# Altium PCB GPS_tracker PCB.PcbDoc (part 1 of 2)
Units mm, origin at the board's own origin, x right, y up, seen from the top; angles counter-clockwise.
Board outline 70 x 70 mm, 2 copper layers (Top Layer, Bottom Layer), stack 1.57 mm thick; 71 components, 56 nets, 304 pads, 132 vias.
Unrouted connection lines stored in the file: 4.
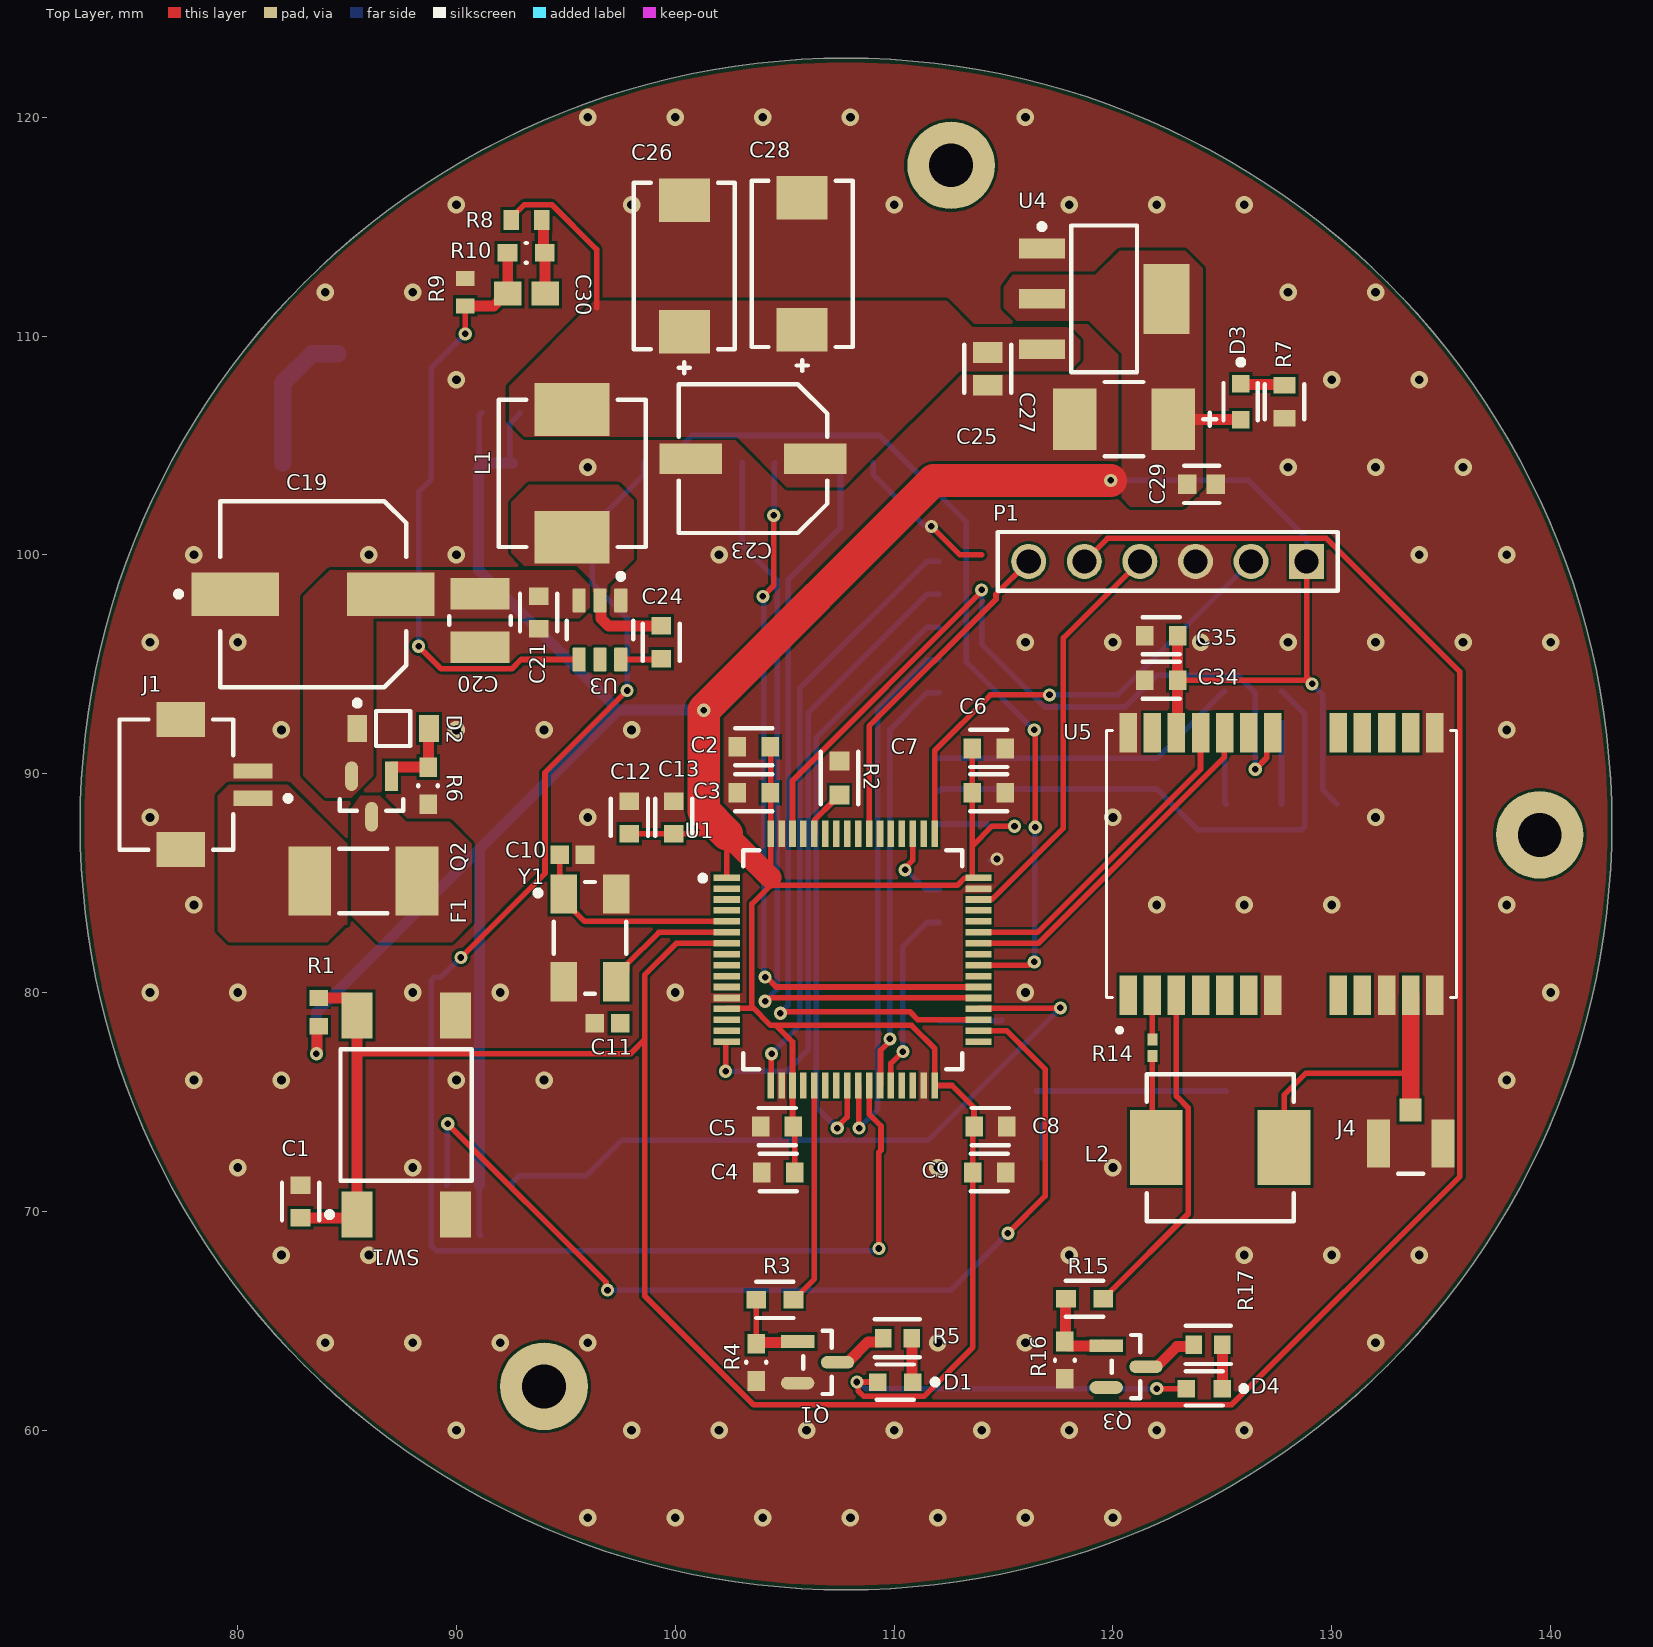
[diagram p0: Top Layer view]
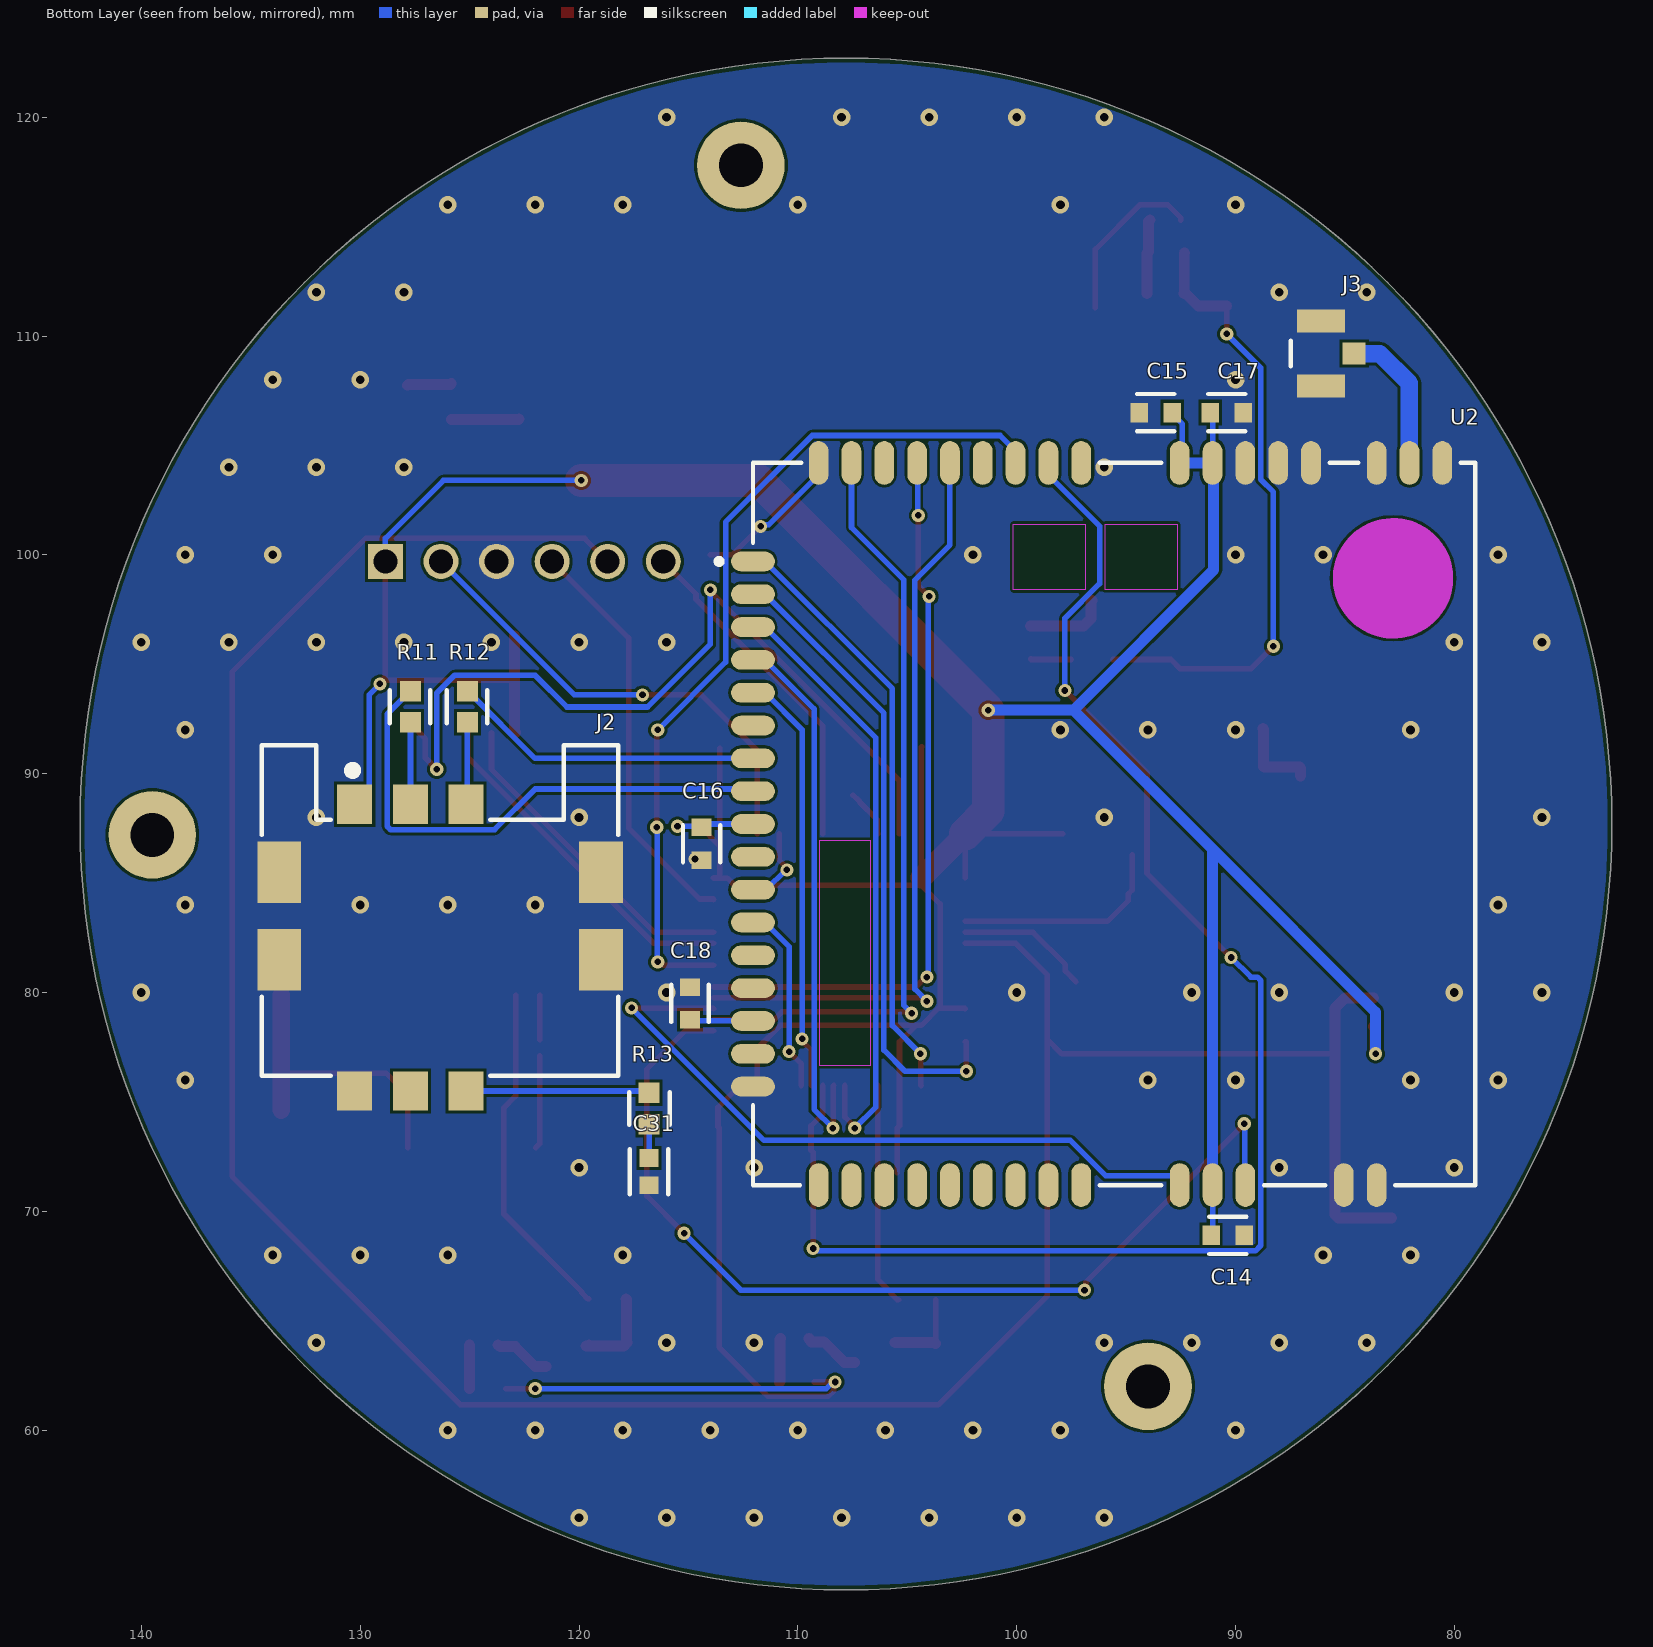
[diagram p1: Bottom Layer view, seen from below]
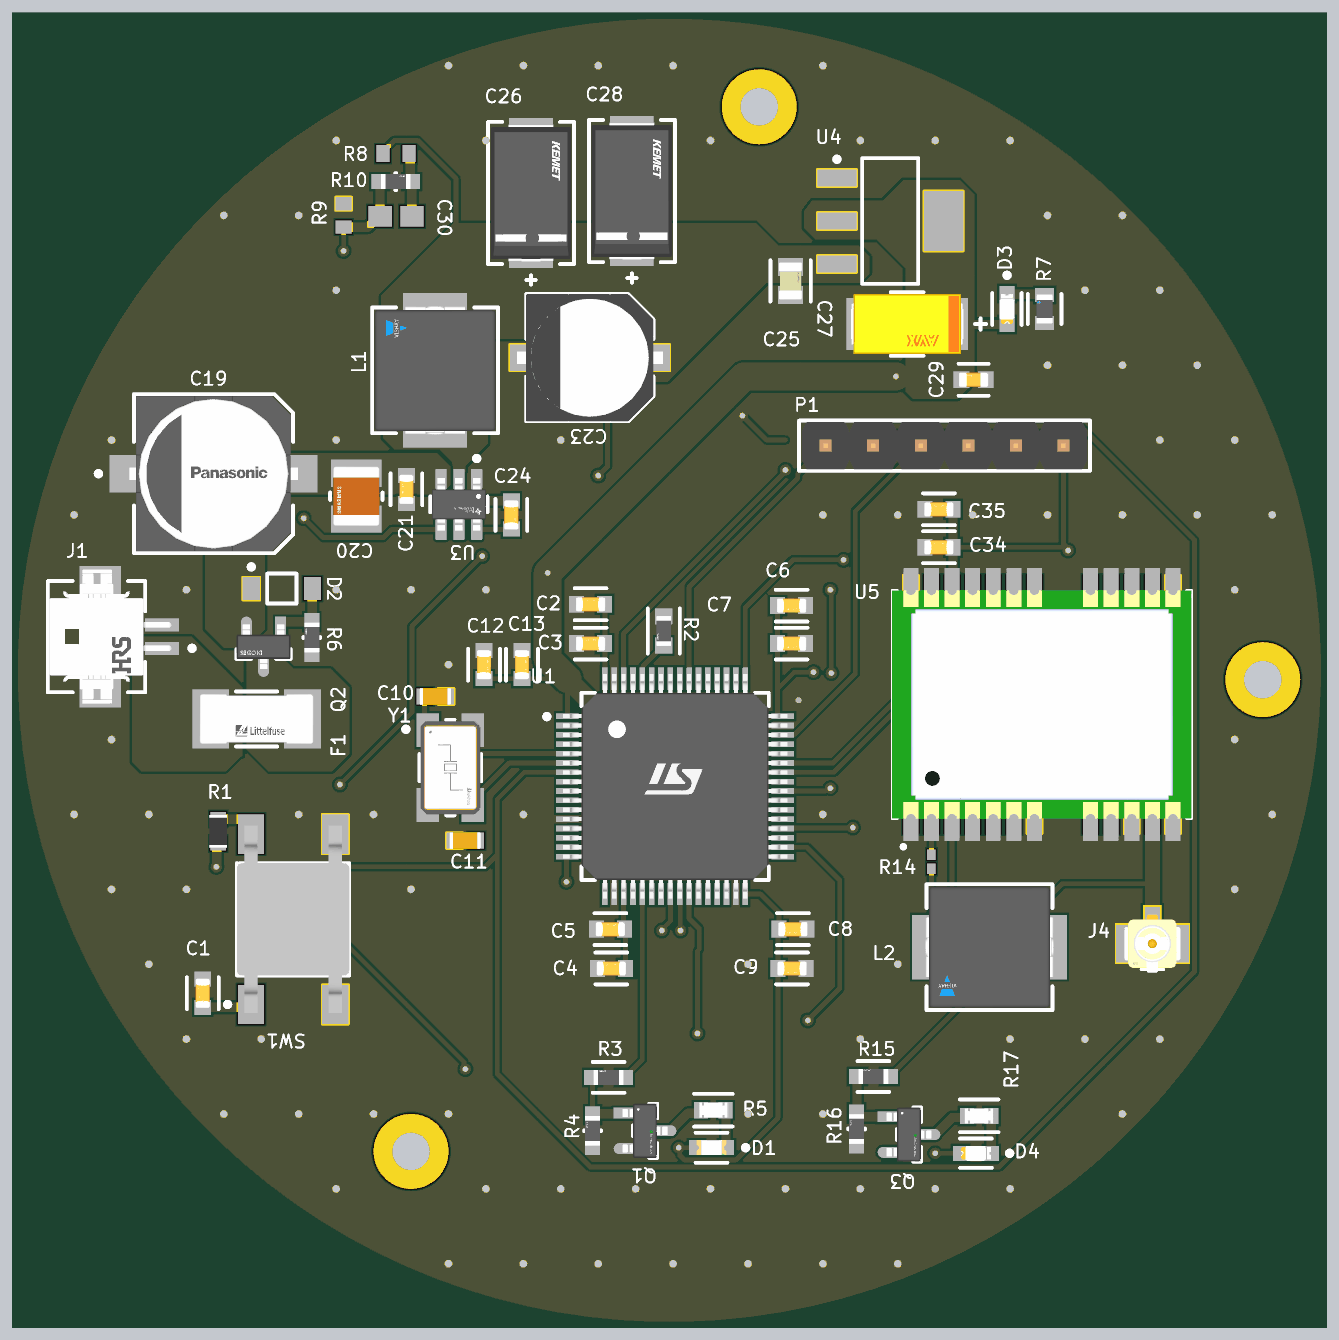
[diagram p2: 3D render of the assembled board from above, using the file's embedded part models]
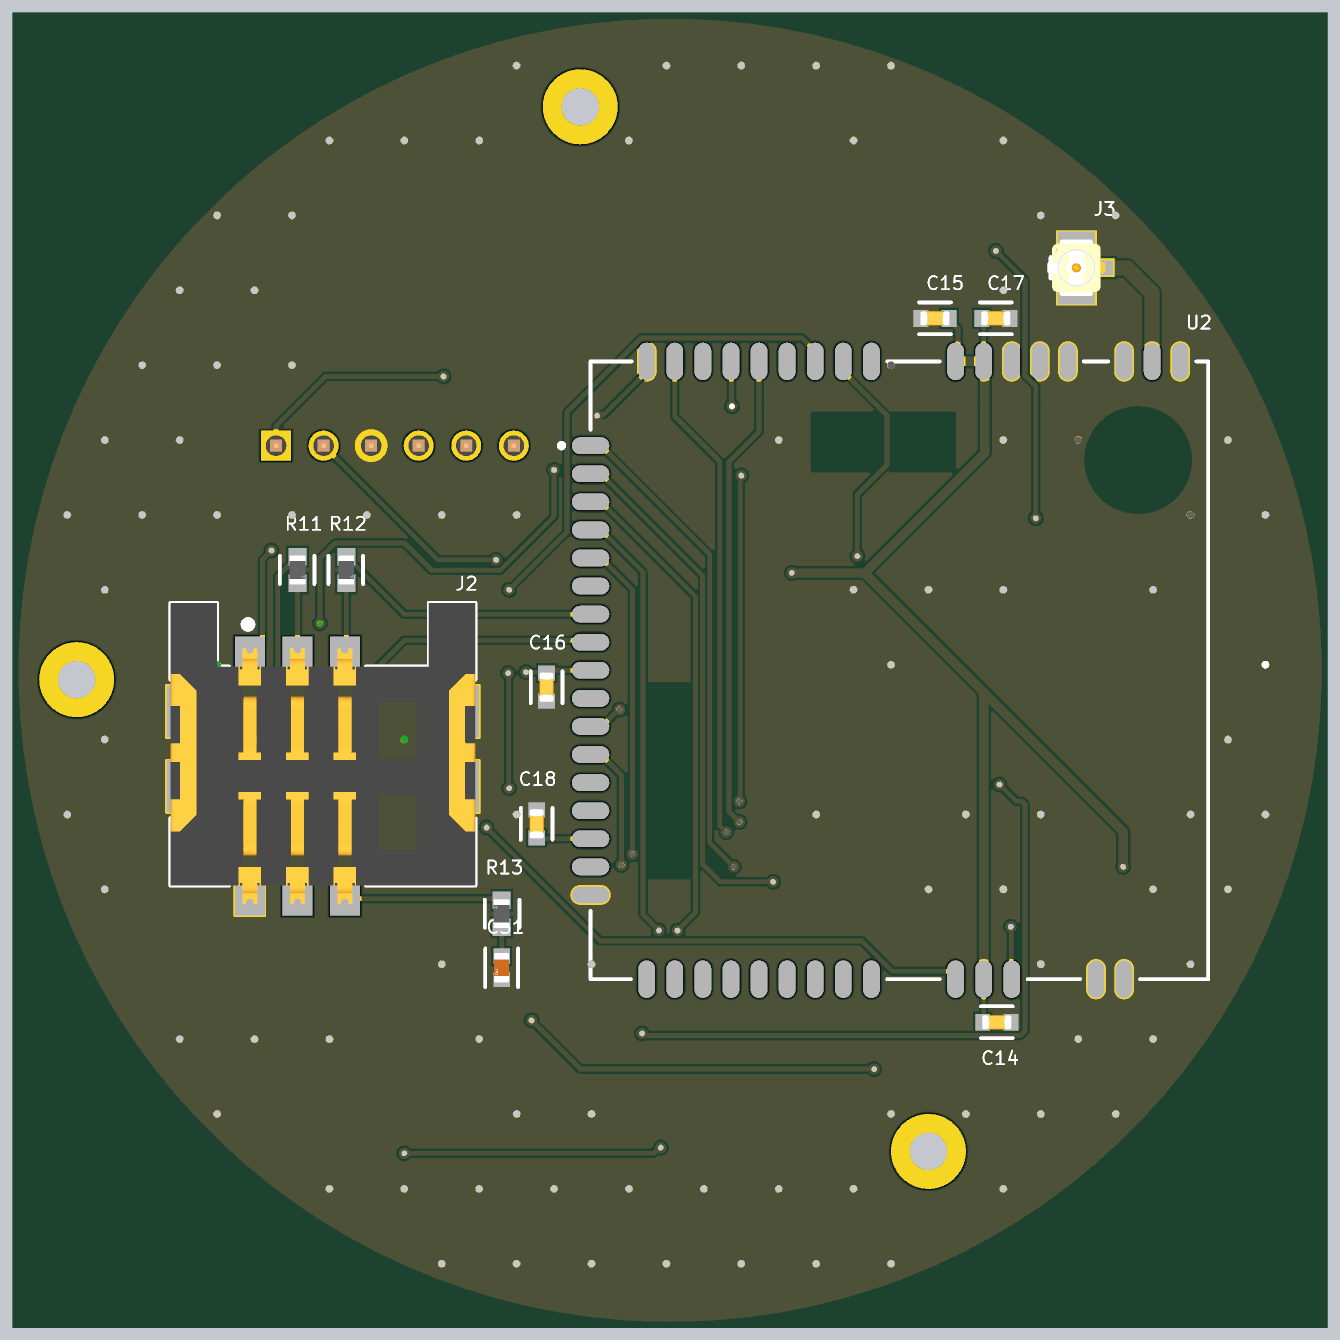
[diagram p3: 3D render of the assembled board from below, using the file's embedded part models]

## Layer stack, top to bottom
Top Solder: solder mask 0.0127, Solder Resist, Dk 3.8
Top Layer: signal copper 0.035
Dielectric: core 1.5, FR-4, Dk 4.5
Bottom Layer: signal copper 0.035
Bottom Solder: solder mask 0.0127, Solder Resist, Dk 3.8

## Board outline
72.8,87.7 ccw(c107.8,87.7) 107.8,52.7 ccw(c107.8,87.7) 142.8,87.7 ccw(c107.8,87.7) 107.8,122.7 ccw(c107.8,87.7)

## Design rules (kind name [scope] priority, off if disabled: settings)
BoardOutlineClearance [All] p1: gap=0.2 ignorepadtopadclearanceinfootprint=FALSE
Clearance [All] p1: gap=0.127 ignorepadtopadclearanceinfootprint=FALSE except(0.25: Arc-Hole Track-Hole SMDPad-Hole THPad-Hole Via-Hole Fill-Hole Poly-Hole Region-Hole Text-Hole)
ComponentClearance [All] p1: gap=0.127 collisioncheckmode=3 verticalgap=0.127 showdistances=TRUE
DiffPairsRouting [All] p1: maxlimit=0.254 minlimit=0.127 mostfreqgap=0.127 toplayer_minwidth=0.127 toplayer_maxwidth=25.4 toplayer_prefwidth=0.127 bottomlayer_minwidth=0.127 bottomlayer_maxwidth=25.4 bottomlayer_prefwidth=0.127 maxuncoupledlength=12.7
Height [All] p1: minheight=0 maxheight=1816.048 prefheight=12.7
HoleSize [All] p1: absolutevalues=TRUE maxlimit=6.3 minlimit=0.3 maxpercent=80.000 minpercent=20.000
HoleToHoleClearance [All] p1: gap=0.25 allowstackedmicrovias=FALSE
MinimumAnnularRing [All] p1: minimumring=0.076
MinimumSolderMaskSliver [All] p1: minsoldermaskwidth=0
PlaneClearance [All] p1: clearance=0.127
PlaneConnect PlaneConnectPowerPads [InPadClass('PowerPads')] p1: planeconnectstyle=Direct reliefexpansion=0.508 reliefentries=4 reliefconductorwidth=0.254 reliefairgap=0.254
PlaneConnect [All] p2: pad.planeconnectstyle=Relief pad.reliefexpansion=0.3 pad.reliefentries=4 pad.reliefconductorwidth=0.127 pad.reliefairgap=0.127 via.planeconnectstyle=Direct via.reliefexpansion=0.3 via.reliefentries=4 via.reliefconductorwidth=0.127 via.reliefairgap=0.127
PolygonConnect PolygonConnectPowerPads [All vs (InPadClass('PowerPads'))] p1: connectstyle=Direct reliefconductorwidth=0.254 reliefentries=4 polygonreliefangle="90 Angle" airgapwidth=0.254
PolygonConnect [All] p2: connectstyle=Direct reliefconductorwidth=0.127 reliefentries=4 polygonreliefangle="90 Angle" airgapwidth=0.127
RoutingVias [All] p1: holewidth=0.3 width=0.6 viastyle="Through Hole" minholewidth=0.3 minwidth=0.6 maxholewidth=0.6 maxwidth=6.6
SilkToSilkClearance [All] p1: silktosilkclearance=0
SilkToSolderMaskClearance [IsPad] p1: minsilkscreentomaskgap=0.127 clearancetoexposedcopper=TRUE
SolderMaskExpansion [All] p1: expansion=0.075 istentingtop=FALSE
Width [All] p1: maxlimit=1.5 minlimit=0.127 preferedwidth=0.254
20 further rules are at their usual default settings.

## Classes and differential pairs
component class "GPS_tracker PWR": C14 C15 C16 C17 C18 C19 C20 C21 C23 C24 C25 C26 C27 C28 C29 C30 D2 D3 F1 J1 L1 Q2 R6 R7 R8 R9 R10 U3 U4
component class "GPS_tracker MCU": C1 C2 C3 C4 C5 C6 C7 C8 C9 C10 C11 C12 C13 D1 P1 Q1 R1 R2 R3 R4 R5 SW1 U1 Y1
component class GPS_tracker_GPS_and_GSM: C31 C34 C35 D4 J2 J3 J4 L2 Q3 R11 R12 R13 R14 R15 R16 R17 U2 U5

## Components (designator, comment, footprint, x,y, rotation, side; value= is the part's Value field where it differs from the comment)
C1 "CC0603KRX7R7BB104" FP-CC0603-DA-MFG 82.875,70.45 r270 top value="100 nF"
C2 "CC0603KRX7R7BB104" FP-CC0603-DA-MFG 103.59,91.227 r180 top value="100 nF"
C3 "CC0603KRX7R7BB105" FP-CC0603-DA-MFG 103.59,89.127 r180 top value="1 uF"
C4 "CC0603KRX7R7BB104" FP-CC0603-DA-MFG 104.7,71.773 r180 top value="100 nF"
C5 "CC0603KRX7R7BB105" FP-CC0603-DA-MFG 104.65,73.873 r180 top value="1 uF"
C6 "CC0603KRX7R7BB104" FP-CC0603-DA-MFG 114.327,91.155 r0 top value="100 nF"
C7 "CC0603KRX7R7BB105" FP-CC0603-DA-MFG 114.327,89.127 r0 top value="1 uF"
C8 "CC0603KRX7R7BB104" FP-CC0603-DA-MFG 114.4,73.873 r0 top value="100 nF"
C9 "CC0603KRX7R7BB105" FP-CC0603-DA-MFG 114.35,71.773 r0 top value="1 uF"
C10 "CC0603JRNPO9BN180" CAPC1608X90X40LL10T20 95.3,86.302 r180 top
C11 "CC0603JRNPO9BN180" CAPC1608X90X40LL10T20 96.9,78.6 r0 top
C12 "CC0603KRX7R7BB104" FP-CC0603-DA-MFG 97.9,88 r90 top value="100 nF"
C13 "CC0603KRX7R7BB105" FP-CC0603-DA-MFG 99.927,88 r90 top value="1 uF"
C14 "CC0603KRX7R7BB104" FP-CC0603-DA-MFG 90.35,68.9 r180 bottom value="100 nF"
C15 "CC0603KRX7R7BB104" FP-CC0603-DA-MFG 93.65,106.5 r0 bottom value="100 nF"
C16 "CC0603KRX7R7BB104" FP-CC0603-DA-MFG 114.4,86.8 r270 bottom value="100 nF"
C17 "CC0603KRX7R7BB104" FP-CC0603-DA-MFG 90.4,106.5 r180 bottom value="100 nF"
C18 "CC0603KRX7R7BB104" FP-CC0603-DA-MFG 114.927,79.5 r90 bottom value="100 nF"
C19 "EEEFK1V221P" FP-FKF-MFG 83.45,98.202 r0 top
C20 "CL32B106KBJNNNE" FP-CL32-IPC_C 91.077,97 r270 top
C21 "CC0603KRX7R7BB104" FP-CC0603-DA-MFG 93.755,97.366 r270 top value="100 nF"
C23 "EEEFK1C101P" PNSC-EEEFK1C101P_L 103.55,104.398 r180 top
C24 "CC0603KRX7R7BB104" FP-CC0603-DA-MFG 99.359,96 r90 top value="100 nF"
C25 "C0805C104K5RACTU" FP-C0805C-DN-MFG 114.273,108.5 r270 top value="0.10 μF"
C26 "T521D107M025ATE040" FP-T521D107M025ATE040-MFG 100.409,113.2 r270 top
C27 "TAJC227K006RNJ" FP-TAJC-MFG 120.5,106.198 r0 top
C28 "T521D107M025ATE040" FP-T521D107M025ATE040-MFG 105.8,113.3 r270 top
C29 "C0603X104K5RACTU" FP-C0603-CJ-MFG 124.05,103.22 r0 top value=100nF
C30 "06035A750JAT2A" CAPC1608X90X35ML15T15 93.2,111.948 r0 top
C31 "06035A220JAT2A" FP-0603-L_1_6_0_15-W_0_81-IPC_C 116.8,71.811 r270 bottom
C34 "CC0603KRX7R7BB104" FP-CC0603-DA-MFG 122.2,94.273 r180 top value="100 nF"
C35 "CC0603KRX7R7BB105" FP-CC0603-DA-MFG 122.2,96.3 r180 top value="1 uF"
D1 "150060RS75000" FP-150060RS75000-MFG 110.05,62.198 r180 top
D2 "MMSZ4699T1G" ONSC-SOD-123-2-425-04_V 87.1,92.065 r0 top
D3 "SML-D12P8WT86C" FP-SML-D12-MFG 125.839,107 r270 top
D4 "SML-D12P8WT86C" FP-SML-D12-MFG 124.175,61.9 r180 top
F1 "0452001.MRL" FP-0452-MFG 85.749,85.1 r0 top value=0.225Ω
J1 "DF13A-2P-1.25H(21)" FP-DF13A-2P-1_25H_21-MFG 77.2,89.5 r90 top
J2 "693010010601" 693010010601 126.35,83.75 r180 bottom
J3 "U.FL-R-SMT-1(10)" FP-U_FL-R-SMT-1_10-MFG 86.1,109.2 r270 bottom
J4 "U.FL-R-SMT-1(10)" FP-U_FL-R-SMT-1_10-MFG 133.6,73.1 r0 top
L1 "IHLP2525CZER100M11" FP-IHLP-2525CZ-FP_2_413x3-MFG 95.286,103.721 r90 top
L2 "IHLP2525CZER220M11" FP-IHLP-2525CZ-FP_2_413x3-MFG 124.9,72.911 r180 top
P1 "61300611121" 61300611121 122.5,99.7 r180 top
Q1 "MMBF170LT1G" FP-318-08-IPC_B 106.5,63.1 r0 top
Q2 "DMP3099L-7" FP-SOT23-IPC_B 86.123,88.958 r270 top
Q3 "MMBF170LT1G" FP-318-08-IPC_B 120.6,62.9 r0 top
R1 "ERJ3EKF1002V" RESC1609X55X30LL15T15 83.7,79.1 r90 top
R2 "AC0603FR-071KL" FP-AC0603-IPC_B 107.5,89.8 r270 top
R3 "AC0603FR-07150RL" FP-AC0603-MFG 104.55,65.952 r180 top
R4 "RC0603FR-07100KL" FP-RC0603-0_55-MFG 103.7,63.1 r90 top
R5 "ERJ-3EKF2000V" FP-ERJ3EK-IPC_C 110.149,64.2 r180 top
R6 "RC0603FR-07100KL" FP-RC0603-0_55-MFG 88.7,89.45 r90 top
R7 "CRCW06031K00FKEA" FP-CRCW0603-e3-MFG 127.842,107 r90 top
R8 "RC0603FR-0749R9L" RESC1608X55X25NL10T15 93.2,115.302 r180 top
R9 "ERJ-3EKF1332V" RESC1608X55X30LL15T15 90.4,112 r270 top
R10 "RC0603FR-07100KL" FP-RC0603-0_55-MFG 93.185,113.8 r0 top
R11 "CRCW060322R0FKEA" FP-CRCW0603-e3-IPC_B 127.7,93.06 r270 bottom
R12 "CRCW060322R0FKEA" FP-CRCW0603-e3-IPC_B 125.1,93.06 r270 bottom
R13 "CRCW060322R0FKEA" FP-CRCW0603-e3-IPC_B 116.798,74.7 r90 bottom
R14 "ERJ1GNF22R0C" RESC0603X26X15ML03T05 121.8,77.475 r90 top
R15 "AC0603FR-07150RL" FP-AC0603-MFG 118.7,66 r180 top
R16 "RC0603FR-07100KL" FP-RC0603-0_55-MFG 117.8,63.2 r90 top
R17 "ERJ-3EKF2000V" FP-ERJ3EK-IPC_C 124.349,63.9 r180 top
SW1 "FSM4JSMATR" TECO-FSM4JSMATR_V 87.702,74.4 r180 top
U1 "STM32L431RCT6" FP-LQFP64-5W-MFG 108.105,81.5 r0 top
U2 "SIM900D" SIMC-SIM900D_V 96.3,87.7 r180 bottom
U3 "TPS54302DDCR" FP-DDC0006A-MFG 96.557,96.566 r270 top
U4 "LD1117S33TR" SOT-223_L 119.6,111.7 r0 top
U5 "NEO-6M-GPS" XCVR_NEO-6M-GPS 127.7,85.875 r90 top
Y1 "ABM3B-8.000MHZ-B2-T" FP-ABM3B-MFG 96.1,82.5 r270 top

## Footprints (in the part's own frame and the unit in brackets; to place one, negate y for a bottom-side part, rotate by r counter-clockwise, add the part's x,y. Pads: shape width x height; smd on the part's side, far side on the other; paste and mask are expansions set on the pad)
61300611121 [mm] "Pin Header, pitch 2.54 mm, THT, Vertical, single row, 6p"
  rect 1.6x1.6 hole 1.1: 1(-6.35,0)
  round 1.6 hole 1.1: 2(-3.81,0) 3(-1.27,0) 4(1.27,0) 5(3.81,0) 6(6.35,0)
  silkscreen extent -7.77,-1.35 7.77,1.35, body extent -7.62,-1.27 7.62,1.27, height 8.57
693010010601 [mm] "SIM Car d Connector - Header - 6 pins"
  rect 1.6x1.8 smd: 1(-3.9,4.85) 2(-1.36,4.85) 3(1.18,4.85) 4(-3.9,-8.25) 5(-1.36,-8.25) 6(1.18,-8.25)
  rect 2x2.8 smd: Shiled(-7.35,-2.25) Shiled(-7.35,1.75) Shiled(7.35,-2.25) Shiled(7.35,1.75)
  silkscreen extent -8.15,-7.55 8.15,7.55, body extent -8.15,-8.55 8.15,7.55, height 1.71
CAPC1608X90X35ML15T15 [mm] "Chip Capacitor, 2-Leads, Body 1.60x0.81mm, IPC Low Density"
  rect 1.25x1.1 smd: 1(-0.85,0) 2(0.85,0)
  body extent -0.88,-0.48 0.87,0.48, height 0.9
CAPC1608X90X40LL10T20 [mm] "Chip Capacitor, 2-Leads, Body 1.7x0.9mm, IPC High Density"
  rect 0.85x0.85 smd: 1(-0.575,0) 2(0.575,0)
  body extent -0.85,-0.45 0.85,0.45, height 0.9
FP-318-08-IPC_B [mm]
  rect 1.524x0.578 smd paste+0 mask+0: 1(-0.91,0.95)
  rrect100% 1.524x0.578 smd paste+0 mask+0: 2(-0.91,-0.95) 3(0.91,0)
  silkscreen extent -0.65,-1.45 0.65,1.45, body extent -1.92,-1.7 1.92,1.7, height 0.25
FP-0452-MFG [mil]
  rect 77x124 smd paste+0 mask+0: 1(-96.5,0) 2(96.5,0)
  silkscreen extent -43,-58 43,58, body extent -139,-66 139,66, height 10
FP-0603-L_1_6_0_15-W_0_81-IPC_C [mm]
  rect 0.807x0.868 smd paste+0 mask+0: 1(-0.626,0) 2(0.626,0)
  silkscreen extent -1.03,-0.88 1.03,0.88, body extent -0.8,-0.41 0.8,0.41, height 0.9
FP-150060RS75000-MFG [mm]
  rect 0.8x0.8 smd paste+0 mask+0: 1(-0.8,0) 2(0.8,0)
  silkscreen extent -1.95,-0.8 0.85,0.8, body extent -1.3,-0.55 1.3,0.55, height 0.25
FP-ABM3B-MFG [mm]
  rect 1.8x1.2 smd paste+0 mask+0: 1(-2,-1.2) 2(2,-1.2) 3(2,1.2) 4(-2,1.2)
  silkscreen extent -2.55,-2.5 2.55,1.65, body extent -3,-1.9 3,1.9, height 0.25
FP-AC0603-IPC_B [mm]
  rect 0.859x0.912 smd paste+0 mask+0: 1(-0.777,0) 2(0.777,0)
  silkscreen extent -1.21,-0.86 1.21,0.86, body extent -1.46,-0.71 1.46,0.71, height 0.25
FP-AC0603-MFG [mm]
  rect 0.9x0.8 smd paste+0 mask+0: 1(-0.85,0) 2(0.85,0)
  silkscreen extent -0.85,-0.82 0.85,0.82, body extent -1.4,-0.55 1.4,0.55, height 0.25
FP-C0603-CJ-MFG [mm]
  rect 0.85x0.9 smd paste+0 mask+0: 1(-0.65,0) 2(0.65,0)
  silkscreen extent -0.8,-0.85 0.8,0.85, body extent -1.2,-0.6 1.2,0.6, height 0.25
FP-C0805C-DN-MFG [mm]
  rect 0.95x1.35 smd paste+0 mask+0: 1(-0.75,0) 2(0.75,0)
  silkscreen extent -1.1,-1.07 1.1,1.07, body extent -1.4,-0.85 1.4,0.85, height 0.25
FP-CC0603-DA-MFG [mm]
  rect 0.8x0.9 smd paste+0 mask+0: 1(-0.75,0) 2(0.75,0)
  silkscreen extent -0.85,-0.85 0.85,0.85, body extent -1.35,-0.75 1.35,0.75, height 0.25
FP-CL32-IPC_C [mm]
  rect 1.453x2.704 smd paste+0 mask+0: 1(-1.225,0) 2(1.225,0)
  silkscreen extent -0.2,-1.4 0.2,1.4, body extent -2.05,-1.5 2.05,1.5, height 0.25
FP-CRCW0603-e3-IPC_B [mm]
  rect 0.935x0.962 smd paste+0 mask+0: 1(-0.715,0) 2(0.715,0)
  silkscreen extent -0.75,-0.95 0.75,0.9, body extent -0.77,-0.43 0.77,0.43, height 0.5
FP-CRCW0603-e3-MFG [mm]
  rect 0.75x1 smd paste+0 mask+0: 1(-0.75,0) 2(0.75,0)
  silkscreen extent -0.8,-0.9 0.8,0.9, body extent -1.22,-0.6 1.22,0.6, height 0.25
FP-DDC0006A-MFG [mm]
  rrect17% 1.1x0.6 smd paste+0 mask+0: 1(-1.35,0.95) 2(-1.35,0) 3(-1.35,-0.95) 4(1.35,-0.95) 5(1.35,0) 6(1.35,0.95)
  silkscreen extent -2.57,-1.53 0.43,1.53, body extent -2,-1.63 2,1.63, height 0.25
FP-DF13A-2P-1_25H_21-MFG [mm]
  rect 0.7x1.8 smd paste+0 mask+0: 1(-0.625,-3.5) 2(0.625,-3.5)
  rect 1.6x2.2 smd paste+0 mask+0: 3(-2.975,-0.2) 4(2.975,-0.2)
  silkscreen extent -2.98,-5.23 2.98,2.6, body extent -3.88,-4.5 3.88,2.7, height 0.25
FP-ERJ3EK-IPC_C [mm]
  rect 0.757x0.862 smd paste+0 mask+0: 1(-0.651,0) 2(0.651,0)
  silkscreen extent -1.03,-0.87 1.03,0.87, body extent -1.13,-0.58 1.13,0.58, height 0.25
FP-FKF-MFG [mm]
  rect 4x2 smd paste+0 mask+0: 1(-3.55,0) 2(3.55,0)
  silkscreen extent -6.27,-4.25 4.25,4.25, body extent -5.8,-4.5 5.8,4.5, height 0.25
FP-IHLP-2525CZ-FP_2_413x3-MFG [mil]
  rect 95x135 smd paste+0 mask+0: 1(-115,0) 2(115,0)
  silkscreen extent -132,-132 132,132, body extent -166,-136 166,136, height 10
FP-LQFP64-5W-MFG [mm]
  rect 1.2x0.3 smd paste+0 mask+0: 1(-5.75,3.75) 2(-5.75,3.25) 3(-5.75,2.75) 4(-5.75,2.25) 5(-5.75,1.75) 6(-5.75,1.25) 7(-5.75,0.75) 8(-5.75,0.25) 9(-5.75,-0.25) 10(-5.75,-0.75) 11(-5.75,-1.25) 12(-5.75,-1.75) 13(-5.75,-2.25) 14(-5.75,-2.75) 15(-5.75,-3.25) 16(-5.75,-3.75) 33(5.75,-3.75) 34(5.75,-3.25) 35(5.75,-2.75) 36(5.75,-2.25) 37(5.75,-1.75) 38(5.75,-1.25) 39(5.75,-0.75) 40(5.75,-0.25) 41(5.75,0.25) 42(5.75,0.75) 43(5.75,1.25) 44(5.75,1.75) 45(5.75,2.25) 46(5.75,2.75) 47(5.75,3.25) 48(5.75,3.75)
  rect 0.3x1.2 smd paste+0 mask+0: 17(-3.75,-5.75) 18(-3.25,-5.75) 19(-2.75,-5.75) 20(-2.25,-5.75) 21(-1.75,-5.75) 22(-1.25,-5.75) 23(-0.75,-5.75) 24(-0.25,-5.75) 25(0.25,-5.75) 26(0.75,-5.75) 27(1.25,-5.75) 28(1.75,-5.75) 29(2.25,-5.75) 30(2.75,-5.75) 31(3.25,-5.75) 32(3.75,-5.75) 49(3.75,5.75) 50(3.25,5.75) 51(2.75,5.75) 52(2.25,5.75) 53(1.75,5.75) 54(1.25,5.75) 55(0.75,5.75) 56(0.25,5.75) 57(-0.25,5.75) 58(-0.75,5.75) 59(-1.25,5.75) 60(-1.75,5.75) 61(-2.25,5.75) 62(-2.75,5.75) 63(-3.25,5.75) 64(-3.75,5.75)
  silkscreen extent -6.97,-5 5,5, body extent -6.45,-6.45 6.45,6.45, height 0.25
FP-RC0603-0_55-MFG [mm]
  rect 0.9x0.8 smd paste+0 mask+0: 1(-0.85,0) 2(0.85,0)
  silkscreen extent -0.03,-0.45 0.03,0.45, body extent -1.4,-0.55 1.4,0.55, height 0.25
FP-SML-D12-MFG [mm]
  rect 0.8x0.8 smd paste+0 mask+0: 1(-0.825,0) 2(0.825,0)
  silkscreen extent -1.92,-0.79 0.85,0.77, body extent -1.33,-0.55 1.33,0.55, height 0.25
FP-SOT23-IPC_B [mm]
  rect 1.359x0.587 smd paste+0 mask+0: 1(-0.927,0.915)
  rrect100% 1.359x0.587 smd paste+0 mask+0: 2(-0.927,-0.915) 3(0.927,0)
  silkscreen extent 0.13,-1.45 0.65,1.45, body extent -1.86,-1.7 1.86,1.7, height 0.25
FP-T521D107M025ATE040-MFG [mm]
  rect 1.99x2.33 smd paste+0 mask+0: 1(-3.01,0) 2(3.01,0)
  silkscreen extent -3.8,-2.3 4.9,2.3, body extent -4.13,-2.42 4.13,2.42, height 0.25
FP-TAJC-MFG [mm]
  rect 2x2.8 smd paste+0 mask+0: 1(-2.25,0) 2(2.25,0)
  silkscreen extent -0.87,-1.7 4.23,1.7, body extent -3.35,-1.8 3.35,1.8, height 0.25
FP-U_FL-R-SMT-1_10-MFG [mm]
  rect 1x1.05 smd paste-1000 mask+0: 1(0,1.525)
  rect 1.05x2.2 smd paste-1000 mask+0: 2(-1.475,0) 3(1.475,0)
  silkscreen extent -0.58,-1.38 0.58,-1.38, body extent -1.5,-1.55 1.5,1.55, height 1.45
ONSC-SOD-123-2-425-04_V [mm] "SOD, 2-Leads, Body 2.69x1.6mm"
  rect 0.91x1.22 smd: 1(-1.635,0) 2(1.635,0)
  silkscreen extent -1.76,-0.8 0.78,1.28, body extent -1.35,-0.8 1.35,0.8, height 1.35
PNSC-EEEFK1C101P_L [mm] "Aluminum Electrolytic Capacitor, Body 6.8x6.8mm, IPC High Density"
  rect 2.85x1.4 smd: 1(-2.85,0) 2(2.85,0)
  silkscreen extent -3.4,-3.4 3.4,3.4, body extent -3.9,-3.4 3.9,3.4, height 6.3
RESC0603X26X15ML03T05 [mm] "Chip Resistor, 2-Leads, Body 0.60x0.30mm, IPC Low Density"
  rect 0.55x0.45 smd: 1(-0.375,0) 2(0.375,0)
  body extent -0.32,-0.16 0.32,0.17, height 0.26
RESC1608X55X25NL10T15 [mm] "Chip Resistor, 2-Leads, Body 1.70x0.90mm, IPC Medium Density"
  rect 0.7x0.9 smd: 1(-0.7,0) 2(0.7,0)
  body extent -0.85,-0.45 0.85,0.45, height 0.55
RESC1608X55X30LL15T15 [mm] "Chip Resistor, 2-Leads, Body 1.60x0.80mm, IPC High Density"
  rect 0.7x0.85 smd: 1(-0.625,0) 2(0.625,0)
  body extent -0.87,-0.48 0.87,0.48, height 0.55
RESC1609X55X30LL15T15 [mm] "Chip Resistor, 2-Leads, Body 1.75x0.95mm, IPC High Density"
  rect 0.75x0.85 smd: 1(-0.65,0) 2(0.65,0)
  body extent -0.87,-0.48 0.87,0.48, height 0.55
SIMC-SIM900D_V [mm] "Module, 48-Leads, Body 33x33mm, Pitch 1.5mm"
  oval 2x0.9 smd: 1(-15.75,12) 2(-15.75,10.5) 3(-15.75,9) 4(-15.75,7.5) 5(-15.75,6) 6(-15.75,4.5) 7(-15.75,3) 8(-15.75,1.5) 9(-15.75,0) 10(-15.75,-1.5) 11(-15.75,-3) 12(-15.75,-4.5) 13(-15.75,-6) 14(-15.75,-7.5) 15(-15.75,-9) 16(-15.75,-10.5) 17(-15.75,-12)
  oval 0.9x2 smd: 18(-12.75,-16.5) 19(-11.25,-16.5) 20(-9.75,-16.5) 21(-8.25,-16.5) 22(-6.75,-16.5) 23(-5.25,-16.5) 24(-3.75,-16.5) 25(-2.25,-16.5) 26(-0.75,-16.5) 27(3.75,-16.5) 28(5.25,-16.5) 29(6.75,-16.5) 30(11.25,-16.5) 31(12.75,-16.5) 32(15.75,16.5) 33(14.25,16.5) 34(12.75,16.5) 35(9.75,16.5) 36(8.25,16.5) 37(6.75,16.5) 38(5.25,16.5) 39(3.75,16.5) 40(-0.75,16.5) 41(-2.25,16.5) 42(-3.75,16.5) 43(-5.25,16.5) 44(-6.75,16.5) 45(-8.25,16.5) 46(-9.75,16.5) 47(-11.25,16.5) 48(-12.75,16.5)
  Top Layer keep-out circle w2.75: c13.5,11.23 r1.375
  Top Layer keep-out region: -3.86,10.7 -3.86,13.7 -0.56,13.7 -0.56,10.7
  Top Layer keep-out region: 0.34,10.7 0.34,13.7 3.64,13.7 3.64,10.7
  Top Layer keep-out region: -12.7,-11.05 -12.7,-0.75 -10.4,-0.75 -10.4,-11.05
  silkscreen extent -17.42,-16.5 17.25,16.5, body extent -15.75,-16.5 17.25,16.5, height 3.05
SOT-223_L [mm] "SOT223, 4-Leads, Body 6.5x3.5mm, Pitch 2.3mm, Lead Span 7mm, IPC High Density"
  rect 2.1x0.9 smd: 1(-2.85,2.3) 2(-2.85,0) 3(-2.85,-2.3)
  rect 2.1x3.2 smd: 4(2.85,0)
  silkscreen extent -2.97,-3.35 1.5,3.42, body extent -1.85,-3.35 1.85,3.35, height 1.8
TECO-FSM4JSMATR_V [mm] "SMD, 4-Leads, Body 6x6mm, Pitch 4.5mm"
  rect 1.4x2.1 smd: 1(2.25,4.55) 2(2.25,-4.55) 3(-2.25,4.55) 4(-2.25,-4.55)
  silkscreen extent -3,-3 3.62,4.67, body extent -3,-5 3,5, height 5.08
XCVR_NEO-6M-GPS [mm]
  rect 1.8x0.8 smd paste-2: 1(-6,7) 2(-6,5.9) 3(-6,4.8) 4(-6,3.7) 5(-6,2.6) 6(-6,1.5) 7(-6,0.4) 8(-6,-2.6) 9(-6,-3.7) 10(-6,-4.8) 11(-6,-5.9) 12(-6,-7) 13(6,-7) 14(6,-5.9) 15(6,-4.8) 16(6,-3.7) 17(6,-2.6) 18(6,0.4) 19(6,1.5) 20(6,2.6) 21(6,3.7) 22(6,4.8) 23(6,5.9) 24(6,7)
  silkscreen extent -7.7,-8 6.1,8, body extent -6.1,-8 6.1,8, height 2.6

## Part data
C1 C2 C4 C6 C8 C12 C14 C15 C16 C17 C18 C21 C24 C34: library part CMP-2000-05002-2, "CAP CER 0.1UF 16V X7R 0603", Capacitance="100 nF", Manufacturer=YAGEO, Package=CC0603-DA, Temperature="-55°C to +125°C", Temperature Characteristic=X7R, Temperature Coefficient=15%, Temperature Range High=+125°C, Temperature Range Low=-55°C, Tolerance=0.1, Voltage="16 V", Automotive=No, Category=Cap, ComponentLink2Description=Datasheet, ComponentLink2URL=http://www.yageo.com/documents/recent/UPY-GPHC_X7R_6.3V-to-50V_18.pdf, Device Class L1="Passive Components", Device Class L2=Capacitors, Device Class L3="Ceramic Capacitors", Digikey Description="CAP CER 0.1UF 16V X7R 0603", Footprint Url=http://www.yageo.com/exep/pages/download/literatures/UPY-C_GEN_24.pdf, Height=0.9mm, Lead Free=Yes, Manufacturer Part Number=CC0603KRX7R7BB104, Material=Ceramic, Mouser Description="Multilayer Ceramic Capacitor, CC Series, 0.1 - F, - 10%, X7R, 16 V, 0603 [1608 Metric]", Octopart=https://octopart.com/cc0603krx7r7bb104-yageo-192941, RoHS=TRUE, Voltage Rating="16 V"
C3 C5 C7 C9 C13 C35: library part CMP-03422-000924-1, "CAP CER 1UF 16V X7R 0603", Capacitance="1 uF", Manufacturer=YAGEO, Package=CC0603-DA, Temperature="-55°C to +125°C", Temperature Characteristic=X7R, Temperature Coefficient=15%, Temperature Range High=+125°C, Temperature Range Low=-55°C, Tolerance=0.1, Voltage="16 V", Automotive=No, Category=Cap, ComponentLink2Description=Datasheet, ComponentLink2URL=http://www.yageo.com/documents/recent/UPY-GPHC_X7R_6.3V-to-50V_18.pdf, Device Class L1="Passive Components", Device Class L2=Capacitors, Device Class L3="Ceramic Capacitors", Digikey Description="CAP CER 1UF 16V X7R 0603", Footprint Url=http://www.yageo.com/exep/pages/download/literatures/UPY-C_GEN_24.pdf, Height=0.9mm, Lead Free=Yes, Manufacturer Part Number=CC0603KRX7R7BB105, Material=Ceramic, Mouser Description="Multilayer Ceramic Capacitor, CC Series, 1 - F, - 10%, X7R, 16 V, 0603 [1608 Metric]", Octopart=https://octopart.com/cc0603krx7r7bb105-yageo-42271928, RoHS=TRUE, Voltage Rating="16 V"
C10 C11: library part CMP-1659-00030-1, "Chip Capacitor, 18 pF, +/- 5%, 50 V, -55 to 125 degC, 0603 (1608 Metric), RoHS, Tape and Reel", Case Code (Imperial)=0603, Case Code (Metric)=1608, Max Operating Temperature="155 degC", Min Operating Temperature="-55 degC", Package Quantity=200, Power Rating="100 mW", Resistance="68.1 Ohm", Tolerance=1%, Voltage Rating="50 V", Case\Package=0603, ComponentLink1Description="Manufacturer URL", ComponentLink1URL=http://www.yageo.com/, ComponentLink2Description=Datasheet, ComponentLink2URL=http://www.yageo.com/NewPortal/yageodocoutput?fileName=/pdf/MLCC/UPY-GP_NP0_16V-to-50V_14.pdf, DatasheetVersion="Rev. 14, 07/2016", Height="0.45 mm", Length="1.6 mm", PackageDescription="2-Pin Surface Mount Device, Body 1.6 x 0.8 mm", PackageReference=0603, Packaging="Tape and Reel", Radiation Hardening=No, RoHSCompliant=true, Width="0.8 mm"
C19: library part CMP-05427-000085-1, "CAP ALUM 220UF 20% 35V SMD", Capacitance=220uF, Case/Package=Radial, Dielectric Material=Aluminium, ESR (Equivalent Series Resistance)=160mR, Leakage Current=3uA, Max Operating Temperature=105°C, Min Operating Temperature=-55°C, Package Quantity=1, Ripple Current=600mA, Tolerance=20%, Voltage=35V, Construction=Cylindrical, Contact Plating=Tin, Diameter=8mm, Height=10.2mm, Height - Seated (Max)=0.402inch, Impedance=160mR, Lead Free="Lead Free", Length=10.2mm, Life (Hours)=2000Hour, Material=Aluminium, Mount="Surface Mount", Number of Pins=2, Packaging="Tape and Reel", Radiation Hardening=No, REACH SVHC="No SVHC", Ripple Current (AC)=600mA, RoHS Compliant=Yes, Series=FK, Size=10.2mm, Termination=SMD/SMT, Voltage Rating=35V, Voltage Rating (DC)=35V, Width=10mm
C20: library part CMP-2000-06110-2, "Cap Ceramic 10uF 50V X7R ±10% SMD 1210 +125°C Embossed T/R", Capacitance=10uF, Case Code (Imperial)=1210, Case Code (Metric)=3225, Dielectric=X7R, Max Operating Temperature=125°C, Min Operating Temperature=-55°C, Package Quantity=1, Tolerance=10%, Voltage=50V, Case/Package=1210, Depth=2.5mm, Height=2.5mm, Lead Free="Lead Free", Length=3.2mm, Material=Ceramic, Mount="Surface Mount", Packaging="Tape and Reel", Radiation Hardening=No, Thickness=0.106inch, Voltage Rating=50V, Voltage Rating (DC)=50V, Width=0.098inch
C23: library part CMP-2000-06203-1, "Aluminum Electrolytic Capacitor, 100 uF, 20%, 16 V, -55 to 105 degC, 2-Pin SMD, RoHS, Tape and Reel", Capacitance=100µF, Case Size/Dimension=Ø6.3x5.8mm, Lifetime@Temperature=2000Hrs@105°C, Manufacturer=Panasonic, Operating Temp Range=-55to+105°C, Operating Temp-Max=105°C, Package Description="2-Pin Surface Mount Device, Body 6.6 x 6.6 mm", Rated Voltage=16V, Ripple Current=240mA, Datasheet URL=http://datasheet.octopart.com/EEEFK1C101P-Panasonic-datasheet-13266987.pdf, Datasheet Version=11/2012, Impedance=0.36O, Manufacturer URL=http://www.panasonic.com/, Mounting Technology=SurfaceMount, Package Reference=EEEFK1C101P, Series=FK, Type=Can
C25: library part CMP-2007-00279-2, "CAP CER 0.1UF 50V X7R 0805", Capacitance="0.10 μF", Manufacturer=KEMET, Package=C0805C-DN, Temperature="-55°C to +125°C", Temperature Characteristic=X7R, Temperature Coefficient=30ppm/°C, Temperature Range High=+125°C, Temperature Range Low=-55°C, Tolerance=0.1, Voltage Rating="50 V", Automotive=No, Category=Cap, ComponentLink2Description=Datasheet, ComponentLink2URL=https://content.kemet.com/datasheets/KEM_C1003_C0G_SMD.pdf, Device Class L1="Passive Components", Device Class L2=Capacitors, Device Class L3="Ceramic Capacitors", Digikey Description="CAP CER 0.1UF 50V X7R 0805", Height=0.88mm, Ipc Land Pattern Name=CAPC200125X78, Lead Free=Yes, Manufacturer Part Number=C0805C104K5RACTU, Material=Ceramic, Mouser Description="Cap Ceramic 0.1uF 50V X7R 10% SMD 2.0 x 1.2 mm 125 C Paper T/R", Octopart=https://octopart.com/c0805c104k5ractu-kemet-143926, RoHS=TRUE
C26 C28: library part CMP-03016-000026-1, "CAP TANT POLY 100UF 25V 2917", Capacitance=100uF, Case Code (Imperial)=2917, Case Code (Metric)=7343, ESR (Equivalent Series Resistance)=40mR, Max Operating Temperature=105°C, Min Operating Temperature=-55°C, Tolerance=20%, Voltage Rating=25V, Case/Package=2917, Features="General Purpose", Height - Seated (Max)=0.122inch, Length=0.287inch, Mount="Surface Mount", Packaging="Cut Tape", REACH SVHC="No SVHC", Series="KO-CAP® T521", Voltage Rating (DC)=25V, Width=0.169inch
C27: library part CMP-04424-000472-1, "220uF 6.3V  ±10% 1.2Ω 2312  SMD Tantalum Capacitor", Capacitance=220uF, Case Code (Imperial)=2312, Case Code (Metric)=6032, Case/Package=2412, Dielectric Material=Tantalum, ESR (Equivalent Series Resistance)=1.2R, Leakage Current=13.9uA, Max Operating Temperature=125°C, Min Operating Temperature=-55°C, Package Quantity=500, Tolerance=10%, Voltage=6.3V, Construction=Flat, Depth=3.2mm, Dissipation Factor=8%, Features="General Purpose", Height=2.6mm, Height - Seated (Max)=0.11inch, Lead Free="Lead Free", Length=6mm, Mount="Surface Mount", Number of Pins=2, Packaging="Tape and Reel", Polarity=Polar, Radiation Hardening=No, REACH SVHC="No SVHC", RoHS Compliant=Yes, Series=TAJ, Termination=SMD/SMT, Voltage Rating=6.3V, Voltage Rating (DC)=6.3V, Width=3.2mm
C29: library part CMP-2006-03300-2, "CAP CER 0.1UF 50V X7R 0603", Capacitance=100nF, Manufacturer=Kemet, Package=C0603-CJ, Temperature="-55°C to +125°C", Temperature Characteristic=X7R, Temperature Coefficient=15%, Temperature Range High=+125°C, Temperature Range Low=-55°C, Tolerance=10%, Voltage=50V, Automotive=No, Category=Cap, ComponentLink2Description=Datasheet, ComponentLink2URL=https://content.kemet.com/datasheets/KEM_C1013_X7R_FT-CAP_SMD.pdf, Device Class L1="Passive Components", Device Class L2=Capacitors, Device Class L3="Ceramic Capacitors", Digikey Description="CAP CER 0.1UF 50V X7R 0603", Height=0.95mm, Ipc Land Pattern Name=CAPC16080X80, Lead Free=Yes, Manufacturer Part Number=C0603X104K5RACTU, Material=Ceramic, Mouser Description="Capacitor; Ceramic; Cap 0.1uF; Tol+10%; SMT; Flexible Termination; Vol-Rtg 50V; TR", Octopart=https://octopart.com/c0603x104k5ractu-kemet-9145062, RoHS=TRUE, Voltage Rating=50V
C30: library part CMP-2006-04358-1, Manufacturer="AVX Interconnect / Elco", Part Number=06035A750JAT2A
C31: library part CMP-2006-04207-3, "General Purpose Ceramic Capacitor, 0603, 22pF, 5%, NP0, 30ppm/°C, 50V", Capacitance=22pF, Case Code (Imperial)=0603, Case Code (Metric)=1608, Dielectric=C0G, Dielectric Material=Ceramic, Insulation Resistance=100GR, Max Operating Temperature=125°C, Min Operating Temperature=-55°C, Package Quantity=1, Temperature Coefficient=30ppm/°C, Tolerance=5%, Voltage=50V, Case/Package=0603, Contact Plating=Tin, Depth=0.81mm, Height=0.63mm, Lead Free="Lead Free", Length=1.6mm, Mount="Surface Mount", Number of Pins=2, Packaging="Tape and Reel", Radiation Hardening=No, REACH SVHC="No SVHC", RoHS Compliant=Yes, Termination=SMD/SMT, Thickness=0.035inch, Voltage Rating=50V, Voltage Rating (DC)=50V, Width=0.81mm
D1: library part CMP-1426-00001-2, "LED RED CLEAR 0603 SMD", Case Code (Imperial)=0603, Case Code (Metric)=1608, Color=Red, Forward Current=30mA, Forward Voltage=2V, Lens Color=Colorless, Max Operating Temperature=85°C, Min Operating Temperature=-40°C, Package Quantity=1, Test Current=20mA, Case/Package=0603, Dominant Wavelength=625nm, Height=0.8mm, Length=1.6mm, Lens Size=0.7mm, Lens Style=Clear, Lens Transparency=Clear, Luminous Intensity=250mcd, Mount="Surface Mount", Packaging="Cut Tape", RoHS Compliant=Yes, Series=WL-SMCW, Viewing Angle=140°, Wavelength=625nm, Width=0.8mm
D2: library part CMP-1060-00478-1, "Zener Voltage Regulator, 500 mW, 2-Pin SOD-123, Pb-Free, Tape and Reel", Manufacturer="On Semiconductor", ComponentLink1Description="Manufacturer URL", ComponentLink1URL=http://www.onsemi.com/, ComponentLink2Description=Datasheet, ComponentLink2URL=http://www.onsemi.com/pub_link/Collateral/MMSZ4678T1-D.PDF, ComponentLink3Description="Package Specification", ComponentLink3URL=http://www.onsemi.com/pub_link/Collateral/425-04.PDF, DatasheetVersion="Rev. 9", Mounting Technology="Surface Mount", P Max (W)=0.5, PackageDescription="2-Pin SOD, Body 1.6 x 2.69 mm", PackageReference=SOD-123-2-425-04, PackageVersion="Rev. G, 10/2009", Packing="Tape and Reel", PartNumber=MMSZ4699T1G, RoHS=Pb-Free, VZ Typ (V)=12
D3 D4: library part CMP-08952-000001-1, "LED GREEN 1608 SMD", Colour=Green, Forward Current=20mA, Forward Voltage=2.2V, Manufacturer=Rohm, Package=SML-D12, Power Dissipation=54mW, Reverse Voltage=5V, Temperature="-40°C to +85°C", Temperature Range High=+85°C, Temperature Range Low=-40°C, Automotive=Yes, Automotive Grade="Grade 3", Category=Diode, ComponentLink2Description=Datasheet, ComponentLink2URL=https://www.rohm.com/datasheet/SML-D12P8W(C)/sml-d12x8(c)-e, Device Class L1=Optoelectronics, Device Class L2=LEDs, Device Class L3=unset, Digikey Description="LED GREEN 1608 SMD", Height=0.65mm, Lead Free=Yes, Led Orientation="Top View", Luminous Intensity=6.3mcd, Manufacturer Part Number=SML-D12P8WT86C, Mouser Description="LED Uni-Color Green Automotive 2-Pin Chip 0603(1608Metric) T/R", Octopart=https://octopart.com/sml-d12p8wt86c-rohm-77740213, RoHS=TRUE, Wavelength=560nm
F1: library part CMP-08605-000042-1, "FUSE BRD MNT 1A 125VAC/VDC 2SMD", Fuse Current=1A, Fuse Interrupt Ac Current=50A, Fuse Interrupt Dc Current=300A, Manufacturer="Littelfuse Inc", Max Fuse Ac Voltage=125V, Package=0452, Resistance=0.225Ω, Temperature="-55°C to +125°C", Temperature Range High=+125°C, Temperature Range Low=-55°C, Automotive=No, Category=Fuse, ComponentLink2Description=Datasheet, ComponentLink2URL=https://www.littelfuse.com/~/media/electronics/datasheets/fuses/littelfuse_fuse_452_454_datasheet.pdf.pdf, Device Class L1="Circuit Protection", Device Class L2=Fuses, Device Class L3=unset, Digikey Description="FUSE BRD MNT 1A 125VAC/VDC 2SMD", Fuse Blow Speed=Slow, Fuse I2T=1.98A2Sec, Height=2.94mm, Lead Free=Yes, Manufacturer Part Number=0452001.MRL, Max Fuse Dc Voltage=125V, Mouser Description="Surface Mount Fuses 125V 1A", Octopart=https://octopart.com/0452001.mrl-littelfuse-566112, RoHS=TRUE, Voltage Rating=125V
J1: library part CMP-11610-000001-1, "CONN HEADER SMD R/A 2POS 1.25MM", Current Rating=1A, Manufacturer=Hirose, Package=0, Temperature="-35°C to +85°C", Temperature Range High=+85°C, Temperature Range Low=-35°C, Voltage Rating=150V, Automotive=No, Category=Conn, ComponentLink2Description=Datasheet, ComponentLink2URL=https://www.hirose.com/product/download/?distributor=digikey&type=2d&lang=en&num=DF13A-2P-1.25H(21), Conn Gender=Male, Conn Orientation="Right Angle", Contact Material=Tin, Device Class L1=Connectors, Device Class L2="Headers and Wire Housings", Device Class L3=unset, Digikey Description="CONN HEADER SMD R/A 2POS 1.25MM", Height=3.75mm, Lead Free=Yes, Manufacturer Part Number=DF13A-2P-1.25H(21), Mouser Description="Headers & Wire Housings 2P SNG ROW PIN HDR R/A SMT", Number Of Contacts=2, Number Of Rows=1, Octopart=https://octopart.com/df13a-2p-1.25h%2821%29-hirose-24789905, Pitch=1.25mm, RoHS=TRUE
J2: library part CMP-1502-00154-1, "WR-CRD Mini SIM Card Connector Header", Manufacturer="Wurth Elektronik", Operating Temperature=-25to85degC, Rated Current=0.5A, Withstanding Voltage=500VAC, Working Voltage=50VAC, Datasheet URL=https://katalog.we-online.de/em/datasheet/693010010601.pdf, Manufacturer URL=http://www.we-online.de, Mounting Technology=SMT, Package Reference=693010010601, Packaging=TapeandReel, Part Number=693010010601, Publisher=WurthElektronik
J3 J4: library part CMP-2000-05152-3, "CONN U.FL RCPT STR 50 OHM SMD", Dielectric Material=Polymer, Frequency=6GHz, Housing Color=Beige, Insulation Resistance=500MR, Max Operating Temperature=90°C, Min Operating Temperature=-40°C, Package Quantity=2500, Body Material=Bronze, Body Plating=Silver, Connector Type=Coaxial, Contact Material=Brass, Contact Plating=Gold, Depth=3.1mm, Fastening Type=Snap, Gender=Male, Impedance=50R, Lead Free="Lead Free", Length=3mm, Max Frequency=6GHz, Mount="Surface Mount", Orientation=Straight, Packaging="Cut Tape", Radiation Hardening=No, REACH SVHC="No SVHC", Series=U.FL, Termination=Solder, Weight=0.001764oz, Wire/Cable Type=Coaxial
L1: library part CMP-02424-000281-1, "Commercial Inductors, Low DCR Series 10uH 4A 71.2mΩ 20%", Case Code (Imperial)=2525, Case Code (Metric)=6363, Current Rating=4A, DC Resistance (DCR)=71.2mR, Inductance=10uH, Inductance Tolerance=20%, Max DC Current=3A, Max Operating Temperature=125°C, Min Operating Temperature=-55°C, Package Quantity=2000, Saturation Current=3.5A, Self Resonant Frequency=5MHz, Test Frequency=100kHz, Case/Package=2525, Contact Plating=Tin, Core Material=Ferrite, Depth=6.72mm, Height=3mm, Height - Seated (Max)=0.118inch, Lead Free="Lead Free", Length=7.24mm, Military Standard=Not, Mount="Surface Mount", Number of Pins=2, Packaging="Tape and Reel", Radiation Hardening=No, RMS Current (Irms)=4A, Shielding=Shielded, Termination=SMD/SMT, Tolerance=20%, Width=0.255inch
L2: library part CMP-2000-06442-2, "Commercial Inductors, Low DCR Series 22uH 2.9A 135mΩ 20%", Case Code (Imperial)=2525, Case Code (Metric)=6363, Current Rating=2.9A, DC Resistance (DCR)=135mR, Inductance=22uH, Inductance Tolerance=20%, Max Operating Temperature=125°C, Min Operating Temperature=-55°C, Package Quantity=2000, Saturation Current=2.5A, Self Resonant Frequency=1MHz, Test Frequency=100kHz, Case/Package=2525, Contact Plating=Tin, Core Material=Ferrite, Depth=6.72mm, Height=3mm, Height - Seated (Max)=0.118inch, Lead Free="Lead Free", Length=7.24mm, Max DC Current=2.9A, Military Standard=Not, Mount="Surface Mount", Number of Pins=2, Packaging="Tape and Reel", Radiation Hardening=No, RMS Current (Irms)=2.9A, Shielding=Shielded, Termination=SMD/SMT, Tolerance=20%, Width=0.255inch
P1: library part CMP-1502-01070-1, "THT Vertical Pin Header WR-PHD, Pitch 2.54 mm, Single Row, 6 pins", Contact Resistance=20mOhm, Manufacturer="Wurth Elektronik", Operating Temperature=-40to105degC, Rated Current=3A, Withstanding Voltage=500VAC, Working Voltage=250VAC, Datasheet URL=https://katalog.we-online.de/em/datasheet/6130xx11121.pdf, Gender=Male, Manufacturer URL=http://www.we-online.de, Mounting Technology=THT, Orientation=Vertical, Package Reference=61300611121, Packaging=Bag, Part Number=61300611121, Pin Number=6, Pitch=2.54mm, Publisher=WurthElektronik, Row Number=Single
Q1 Q3: library part CMP-1058-00793-2, "MOSFET N-CH 60V 500MA SOT-23", Case/Package=SOT-23-3, Continuous Drain Current (ID)=500mA, Drain to Source Breakdown Voltage=60V, Drain to Source Resistance=5R, Gate to Source Voltage (Vgs)=20V, Input Capacitance=60pF, Max Operating Temperature=150°C, Max Power Dissipation=225mW, Min Operating Temperature=-55°C, Package Quantity=3000, Threshold Voltage=3V, Current Rating=500mA, Drain-source On Resistance-Max=5R, Element Configuration=Single, Height=0.94mm, Lead Free="Lead Free", Length=2.9mm, Nominal Vgs=3V, Number of Elements=1, Number of Pins=3, On-State Resistance=5R, Packaging="Tape and Reel", Polarity=N-CHANNEL, Polarization=N, Power Dissipation=225mW, Radiation Hardening=No, Rds On Max=5R, REACH SVHC="No SVHC", RoHS Compliant=Yes, Series=-, Turn-Off Delay Time=10ns, Turn-On Delay Time=10ns, Voltage Rating (DC)=60V, Width=1.3mm
Q2: library part CMP-12801-000062-2, "MOSFET P-CH 30V SOT23", Case/Package=SOT-23, Continuous Drain Current (ID)=3.8A, Drain to Source Resistance=65mR, Drain to Source Voltage (Vdss)=-30V, Gate to Source Voltage (Vgs)=20V, Input Capacitance=563pF, Max Operating Temperature=150°C, Max Power Dissipation=1.08W, Min Operating Temperature=-55°C, Package Quantity=3000, Threshold Voltage=-2.1V, Contact Plating=Tin, Element Configuration=Single, Fall Time=15ns, Height=1.1mm, Lead Free="Lead Free", Length=3mm, Mount="Surface Mount", Number of Channels=1, Number of Pins=3, Packaging="Tape and Reel", Radiation Hardening=No, Rds On Max=65mR, REACH SVHC="No SVHC", Rise Time=5ns, Turn-Off Delay Time=31ns, Turn-On Delay Time=4.8ns, Weight=0.000282oz, Width=1.4mm
R1: library part CMP-1012-00623-3, "Chip Resistor, 10 KOhm, +/- 1%, 0.1 W, -55 to 155 degC, 0603 (1608 Metric), RoHS, Tape and Reel", Case Code (Imperial)=0603, Case Code (Metric)=1608, Manufacturer=Panasonic, Max Operating Temperature=155degC, Max Power Dissipation=100mW, Min Operating Temperature=-55degC, Package Description="2-Pin Surface Mount Device, Body 1.6 x 0.85 mm", Package Quantity=1, Package Reference=603, Resistance=10KOhm, Temperature Coefficient=100ppm\/degreesC, Tolerance=1%, Voltage Rating=75V, Case\/Package=0603, Composition=ThickFilm, Contact Plating=Tin, Datasheet URL=https://industrial.panasonic.com/cdbs/www-data/pdf/RDA0000/AOA0000C304.pdf, Datasheet Version=02/2017, Depth=0.8mm, Height=0.45mm, Lead Free=LeadFree, Length=1.6mm, Manufacturer URL=http://www.panasonic.com/, Military Standard=Not, Mount=SurfaceMount, Mounting Technology=SurfaceMount, Number of Pins=2, Number of Terminations=2, Packaging=TapeandReel, Power Rating=100mW, Radiation Hardening=No, REACH SVHC=NoSVHC, RoHSCompliant=true, Termination=SMD/SMT, Voltage Rating (DC)=75V, Width=0.031inch
R2: library part CMP-2000-04828-3, "RES 1kΩ 1.00% 0.1W 0603", Case Code (Imperial)=0603, Case Code (Metric)=1608, Max Operating Temperature=155°C, Max Power Dissipation=100mW, Min Operating Temperature=-55°C, Package Quantity=1, Ratings=AEC-Q200, Resistance=1kR, Resistor Type="Thick Film", Temperature Coefficient=100ppm/°C, Tolerance=1%, Voltage Rating=50V, Case/Package=0603, Construction=Rectangular, Depth=0.8mm, Features="Moisture Resistant", Height=0.022inch, Lead Free="Lead Free", Length=0.063inch, Military Standard=Not, Number of Terminations=2, Packaging="Tape and Reel", Power Rating=100mW, RoHS Compliant=Yes, Series=AC, Size Code=0603, Termination=SMD/SMT, Width=0.031inch
R3 R15: library part CMP-2000-04821-3, "RES 150Ω 1.00% 0.1W 0603", Case Code (Imperial)=0603, Case Code (Metric)=1608, Max Operating Temperature=155°C, Max Power Dissipation=100mW, Min Operating Temperature=-55°C, Ratings=AEC-Q200, Resistance=150R, Resistor Type="Thick Film", Temperature Coefficient=100ppm/°C, Tolerance=1%, Voltage Rating=50V, Case/Package=0603, Features="Moisture Resistant", Height=0.45mm, Length=1.6mm, Number of Terminations=2, Packaging="Tape and Reel", Power Rating=100mW, RoHS Compliant=Yes, Series=AC, Termination=SMD/SMT, Width=0.8mm
R4 R6 R10 R16: library part CMP-2100-03662-2, "RES SMD 100K OHM 1% 1/10W 0603", Case Code (Imperial)=0603, Case Code (Metric)=1608, Max Operating Temperature=155°C, Max Power Dissipation=100mW, Min Operating Temperature=-55°C, Resistance=100kR, Resistance Tolerance=1%, Resistor Type="Thick Film", Temperature Coefficient=100ppm/°C, Voltage Rating=50V, Working Voltage=75V, Case/Package=0603, Construction=Rectangular, Depth=0.8mm, Features="Moisture Resistant", Height=0.45mm, Lead Free="Lead Free", Length=1.6mm, Military Standard=Not, Number of Pins=2, Number of Terminations=2, Packaging="Tape and Reel", Power Rating=100mW, REACH SVHC="No SVHC", RoHS Compliant=Yes, Series=RC, Technology="THICK FILM", Termination=SMD/SMT, Tolerance=1%, Voltage Rating (DC)=50V, Width=0.8mm
R5 R17: library part CMP-2000-00316-2, "RES SMD 200 OHM 1% 1/10W 0603", Case Code (Imperial)=0603, Case Code (Metric)=1608, Max Operating Temperature=155°C, Max Power Dissipation=100mW, Min Operating Temperature=-55°C, Package Quantity=1, Resistance=200R, Resistance Tolerance=1%, Resistor Type="Thick Film", Temperature Coefficient=100ppm/°C, Voltage Rating=75V, Voltage Rating (DC)=50V, Case/Package=0603, Construction=Rectangular, Contact Plating=Tin, Depth=0.8mm, Features="Automotive AEC-Q200", Height=0.022inch, Lead Free="Lead Free", Length=1.6mm, Military Standard=Not, Mount="Surface Mount", Number of Terminations=2, Packaging="Tape and Reel", Power Rating=100mW, Radiation Hardening=No, REACH SVHC="No SVHC", RoHS Compliant=Yes, Series=ERJ, Technology="THICK FILM", Termination=SMD/SMT, Tolerance=1%, Width=0.031inch, Working Voltage=75V
R7: library part CMP-1666-00003-5, "RES Thick Film, 1kΩ, 1%, 0.1W, 100ppm/°C, 0603", Case Code (Imperial)=0603, Case Code (Metric)=1608, Max Operating Temperature=155°C, Max Power Dissipation=100mW, Min Operating Temperature=-55°C, Package Quantity=10, Resistance=1kR, Temperature Coefficient=100ppm/°C, Tolerance=1%, Voltage Rating=75V, Case/Package=0603, Composition="Thick Film", Contact Plating=Tin, Depth=0.85mm, Features="Automotive AEC-Q200", Height=0.45mm, Lead Free="Lead Free", Length=1.55mm, Military Standard=Not, Mount="Surface Mount", Number of Pins=2, Number of Terminations=2, Packaging="Tape and Reel", Power Rating=100mW, Radiation Hardening=No, Termination=SMD/SMT, Voltage Rating (DC)=75V, Weight=7.1E-05oz, Width=0.033inch
R8: library part CMP-1659-00036-1, "General Purpose Chip Resistor, 49.9 Ohm, +/- 1%, -55 to 155 degC, 0603 (1608 Metric), RoHS, Tape and Reel", Case\Package=LQFP, Max Operating Temperature="85 degC", Max Supply Voltage="3.63 V", Min Operating Temperature="-40 degC", Min Supply Voltage="2.97 V", Package Quantity=250, ComponentLink1Description="Manufacturer URL", ComponentLink1URL=http://www.yageo.com/, ComponentLink2Description=Datasheet, ComponentLink2URL=https://datasheet.ciiva.com/11808/0900766b80f96399-11808223.pdf, DatasheetVersion="Rev. 4, 04/2009", Interface=SPI, PackageDescription="2-Pin Surface Mount Device, Body 1.6 x 0.8 mm", PackageReference=0603, Packaging=Tray, Pins=48, RoHSCompliant=true
R9: library part CMP-2000-00238-1, Manufacturer=Panasonic, Part Number=ERJ-3EKF1332V
R11 R12 R13: library part CMP-2000-03097-2, "RES Thick Film, 22Ω, 1%, 0.1W, 100ppm/°C, 0603", Case Code (Imperial)=0603, Case Code (Metric)=1608, Max Operating Temperature=155°C, Min Operating Temperature=-55°C, Package Quantity=5000, Power Rating=100mW, Resistance=22R, Temperature Coefficient=100ppm/°C, Tolerance=1%, Voltage Rating=75V, Case/Package=0603, Composition="Thick Film", Contact Plating=Tin, Depth=0.85mm, Height=0.45mm, Lead Free="Lead Free", Length=1.55mm, Military Standard=Not, Mount="Surface Mount", Packaging="Tape and Reel", Radiation Hardening=No, Termination=SMD/SMT, Voltage Rating (DC)=75V, Weight=7.1E-05oz, Width=0.85mm
R14: library part CMP-2004-03488-1, Manufacturer=Panasonic, Part Number=ERJ1GNF22R0C
SW1: library part CMP-2000-07486-1, "Micro Miniature Push Button Switch FSM JSM, 50 mA, -35 to 85 degC, 4-Pin SMD, RoHS, Tape and Reel", Capacitance=0f, Case\/Package=SMD/SMT, Contact Current Rating=50mA, Contact Resistance=100mOhm, Manufacturer="TE Connectivity", Max Operating Temperature=85degC, Max Voltage Rating (DC)=12V, Min Operating Temperature=-35degC, Operating Force=160gf, Package Description="4-Pin Surface Mount Device, Body 6 x 6 mm, Pitch 4.5 mm", Package Quantity=1200, Voltage Rating (DC)=24V, Actuator Length=0.055inch, Actuator Material=Polyamide, Contact Material=CopperAlloy, Contact Plating=Silver, Current Rating=50mA, Datasheet URL=http://www.te.com/commerce/DocumentDelivery/DDEController?Action=showdoc&DocId=Customer+Drawing%7F2-1437565-7%7FV%7Fpdf%7FEnglish%7FENG_CD_2-1437565-7_V.pdf%7F4-1437565-2, Datasheet Version="Rev. V, 02/2015", Electrical Life=100000Cycles, Illumination Type=Illuminated, Manufacturer URL=http://www.te.com/, Mechanical Life=100000Cycles, Mount=SurfaceMount, Mounting Technology=SurfaceMount, Orientation=Straight, Package Reference=FSM4JSMATR, Packaging=TapeandReel, REACH SVHC=Unknown, RoHSCompliant=true, Switch Travel=0.25mm, Termination=GullWing, Throw Configuration=SPST
U1: library part CMP-12105-000010-1, "IC MCU 32BIT 256KB FLASH 64LQFP", Ambient Temperature Range High=+85°C, Ambient Temperature Range Low=-40°C, Frequency=80MHz, Manufacturer=STMicroelectronics, Max Junction Temp=+105°C, Max Supply Voltage=3.6V, Min Supply Voltage=1.62V, Package=LQFP64-5W, Temperature="-40°C to +105°C", Automotive=No, Category=IC, ComponentLink2Description=Datasheet, ComponentLink2URL=https://www.st.com/resource/en/datasheet/stm32l431rc.pdf, Core Architecture="ARM Cortex-M4", Data Bus Width=32bits, Device Class L1="Integrated Circuits (ICs)", Device Class L2="Embedded Processors and Controllers", Device Class L3=Microcontrollers, Digikey Description="IC MCU 32BIT 256KB FLASH 64LQFP", Height=1.6mm, Interface=I2C,SPI,USART,CAN,LIN,IrDA,Other, Lead Free=Yes, Manufacturer Part Number=STM32L431RCT6, Memory Size=256KBytes, Memory Type=FLASH, Mouser Description="MCU 32-Bit STM32 ARM Cortex M4 RISC 256KB Flash 1.8V/2.5V/3.3V 64-Pin LQFP Tray", Number Of A/D Converters=1, Number Of Adc Channels=16, Number Of Cores=1, Number Of I2C Channels=3, Number Of I/Os=52, Number Of Pwm Channels=11, Number Of Spi Channels=3, Number Of Timers/Counters=8, Number Of Uart Channels=4, Octopart=https://octopart.com/stm32l431rct6-stmicroelectronics-74606534, Ram Size=64KBytes, RoHS=TRUE, Standoff Height=0.05mm, Temperature Range High=+105°C, Temperature Range Low=-40°C
U2: library part CMP-2000-07069-1, "Quad-Band GSM/GPRS Module, 850/900/1800/1900 MHz, 3.2 to 4.8 V, -40 to 85 degC, 48-Pin SMD, RoHS, Tape and Reel", Manufacturer="SIM Com", Package Description="48-Pin Surface Mount Device, Body 33 x 33 mm, Pitch 1.5 mm", Datasheet URL=http://mt-system.ru/sites/default/files/documents/sim900d_hardware_design_v2.02_0.pdf, Datasheet Version="Rev. 2.02, 05/2012", Manufacturer URL=http://simcomm2m.com/, Mounting Technology=SurfaceMount, Package Reference=SIM900D
U3: library part CMP-04918-000032-1, "IC REG BUCK ADJ 3A TSOT23-6", Manufacturer="Texas Instruments", Max Junction Temp=+125°C, Max Supply Voltage=28V, Min Supply Voltage=4.5V, Nominal Supply Current=45uA, Output Current=3A, Output Voltage=0.6-26V, Package=DDC0006A, Switching Frequency=400kHz, Temperature="-40°C to +125°C", Temperature Range Low=-40°C, Automotive=No, Category=IC, ComponentLink2Description=Datasheet, ComponentLink2URL=http://www.ti.com/lit/ds/symlink/tps54302.pdf, Device Class L1="Integrated Circuits (ICs)", Device Class L2="Power Management ICs", Device Class L3="Voltage Regulators - Switching", Digikey Description="IC REG BUCK ADJ 3A TSOT23-6", Height=1.1mm, Ipc Land Pattern Name=SOT95P280X110-6, Lead Free=Yes, Manufacturer Part Number=TPS54302DDCR, Max Duty Cycle=100%, Number Of Outputs=1, Octopart=https://octopart.com/tps54302ddcr-texas+instruments-74209025, Output Type=AdjustableProgrammable, RoHS=TRUE, Standoff Height=0mm, Switching Topology=Buck, Temperature Range High=+125°C
U4: library part CMP-0244-00310-1, "Fixed Low Drop Positive Voltage Regulator, 3.3V, 4-Pin SOT-223, Tape and Reel", ComponentLink1Description="Manufacturer URL", ComponentLink1URL=http://www.st.com, ComponentLink2Description=Datasheet, ComponentLink2URL=http://www.st.com/internet/com/TECHNICAL_RESOURCES/TECHNICAL_LITERATURE/DATASHEET/CD00000544.pdf, DatasheetVersion=1/11/2011, PackageDescription="4-Pin SOT-223 Package, 6.5 x 3.5 mm Body, 2.3 mm Pitch, 7 mm Lead Span", PackageReference=SOT-223, PackageVersion=2010
U5: "GPS Development Tools SparkFun GNSS-RTK Dead Reckoning Breakout - ZED-F9K (Qwiic)", Package=None, Availability="Not in stock", Check_prices=https://www.snapeda.com/parts/NEO-6M-GPS/u-blox/view-part/?ref=eda, MF=u-blox, MP=NEO-6M-GPS, Price=None, SnapEDA_Link=https://www.snapeda.com/parts/NEO-6M-GPS/u-blox/view-part/?ref=snap
Y1: library part CMP-1688-00002-2, "Crystal 8MHz ±20ppm 18pF SMD-4 5mm x 3.2mm", Case/Package=CSMD, ESR (Equivalent Series Resistance)=200R, Frequency=8MHz, Frequency Stability=50ppm, Frequency Tolerance=20ppm, Load Capacitance=18pF, Max Operating Temperature=70°C, Min Operating Temperature=-20°C, Operating Frequency="8 MHz", Package Quantity=1000, Resistor Type=Ceramic, Depth=3.2mm, Height=0.043inch, Lead Free="Lead Free", Length=5mm, Mount="Surface Mount", Number of Pins=4, Packaging="Tape and Reel", Series=ABM3B, Series Resistance=200R, Termination=SMD/SMT, Tolerance=20ppm, Width=0.126inch

## Free pads (board coordinates)
  round 4 hole 2: 2(94,62) 2(112.6,117.8) 2(139.5,87.2)

## Via types
v1: diameter 0.8, hole 0.4, Top Layer to Bottom Layer, tented both sides, 96 vias
v2: diameter 0.6, hole 0.3, Top Layer to Bottom Layer, tented both sides, 36 vias

## Nets (pads, with @x,y where several pads share a name; then routed paths per layer and width w, separated by ;. In a path a pad name is that pad's centre, name@x,y a point inside that pad or via, vN(x,y) a via of type N, cw(c..) or ccw(c..) an arc to the next point about the centre after c; other vN are vias at no path point)
3.3V: C2.1 C3.1 C4.1 C5.1 C6.1 C7.1 C8.1 C9.1 C12.1 C13.1 C14.1 C15.1 C16.1 C17.1 C18.1 C27.2 C29.1 C34.1 C35.1 D1.2 D3.2 D4.2 J2.1 P1.1 R1.1 U1.1 U1.13 U1.19 U1.32 U1.48 U1.64 U2.9 U2.15 U2.28 U2.38 U2.39 U4.2 U4.4 U5.22 U5.23 | length 230.6
  Top Layer w0.254: C12.1 C13.1 101.563,87.25 ; U1.13 102.378,79.273 103.582,79.273 ; U1.1 102.355,87.245 ; C2.1 104.355,91.213 U1.64 104.355,85.255 ; 104.35,84.895 103.5,84.045 103.5,79.355 104.355,78.5 104.6,78.5 ; 104.355,85.25 104.355,84.9 112.895,84.9 113.222,85.227 113.832,85.227 U1.48 113.6,85.25 113.577,85.273 113.577,86.7 ; C4.1 105.45,73.823 C5.1 105.355,73.918 U1.19 105.355,77.745 104.6,78.5 ; D1.2 109.247,62.2 v2(108.3,62.2) 108.357,62.143 108.357,61.801 108.614,61.544 111.355,61.544 113.6,63.789 C9.1 113.6,73.823 C8.1 113.65,74.75 112.65,75.75 U1.32 111.855,77.445 110.8,78.5 104.6,78.5 ; C6.1 C7.1 113.577,86.7 ; v2(115.5,87.6) 114.477,87.6 113.577,86.7 ; v2(122,61.9) D4.2 ; C34.1 128.834,94.273 129.006,94.1 v2(129.1,94.1) 129.1,94.194 128.85,94.444 P1.1
  Top Layer w0.5: v2(83.6,77.2) 83.619,77.219 83.619,78.369 R1.1 ; C27.2 122.773,106.175 D3.2 ; U5.22 122.95,91.925 C34.1 C35.1
  Top Layer w1: 102.355,87.245 104.35,85.25